# EAGLE board 2x4_v1_CS (EAGLE 5.06)
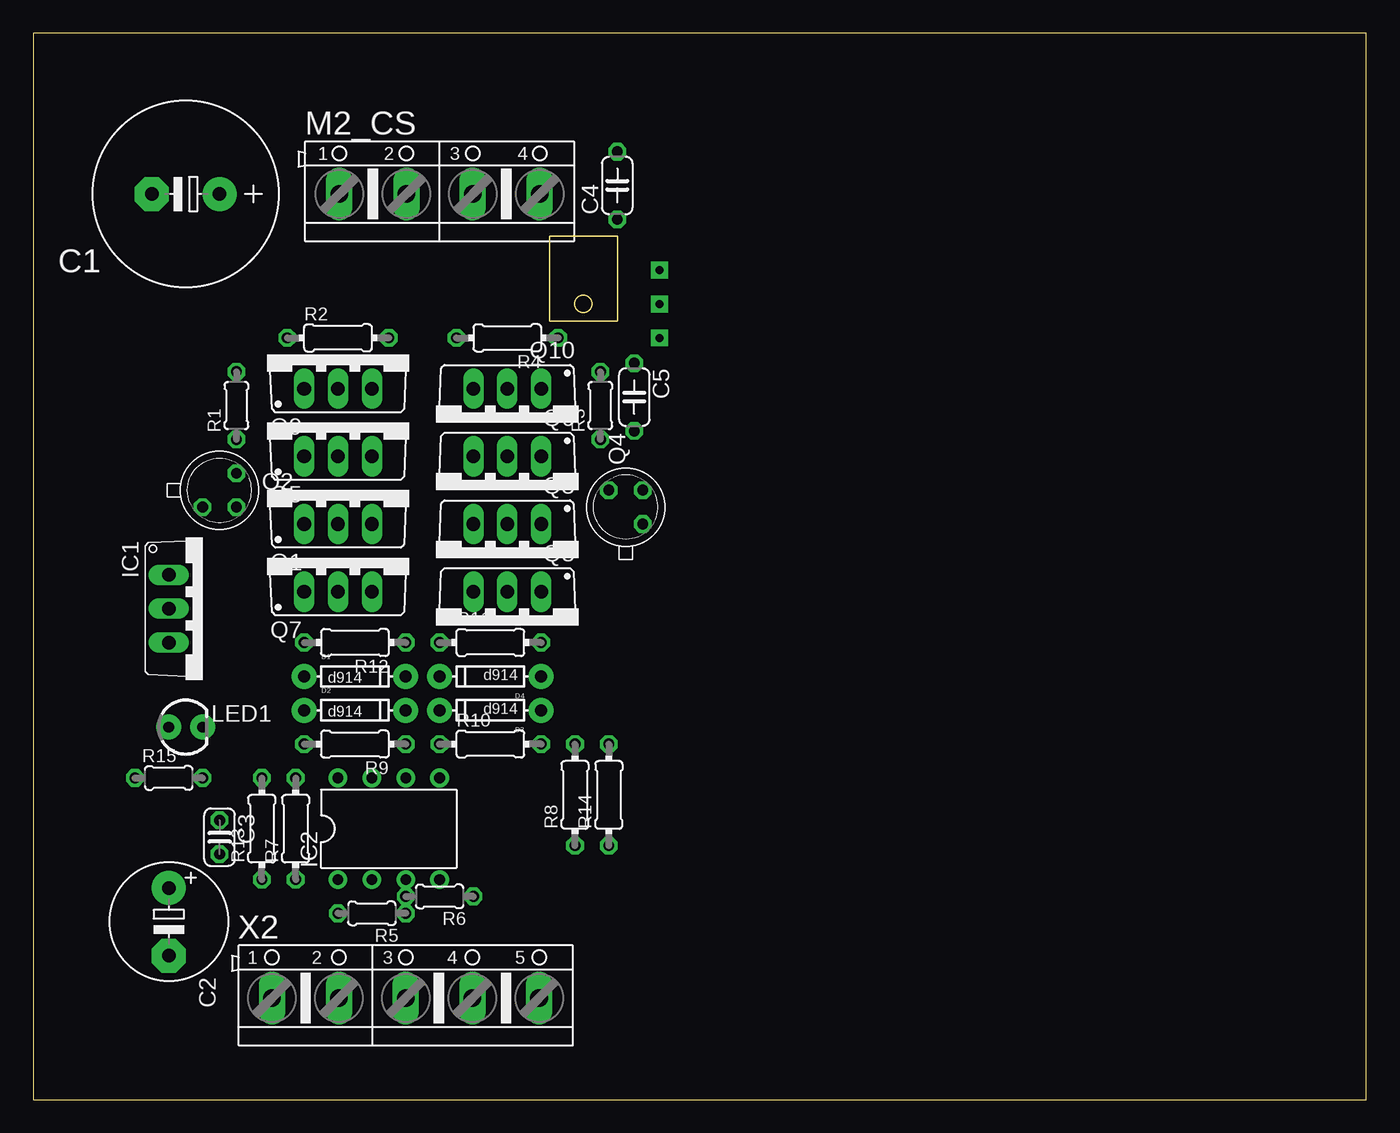
[diagram p0: board, top side]
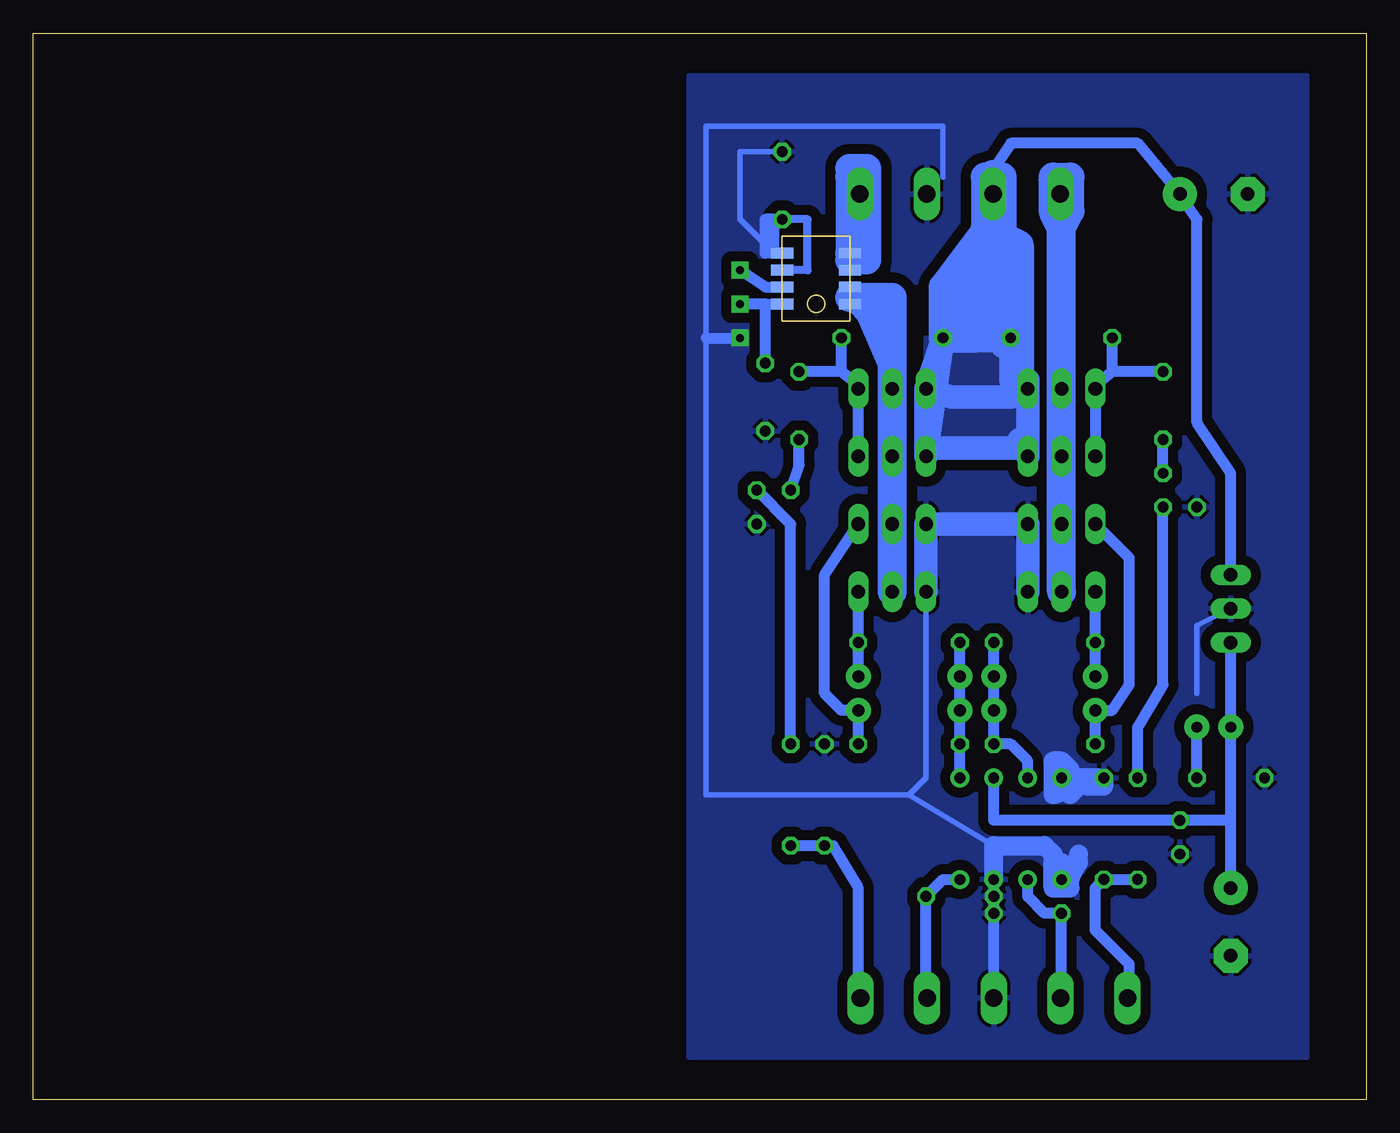
[diagram p1: board, bottom side, seen from below]

Size 100 x 80 mm. Coordinates in mm from the lower left corner, seen from the top.
Outline: 0,0 100,0 100,80 0,80 0,0
Copper layers (1*16): Top 0.035mm / dielectric 1.5mm / Bottom 0.035mm
Design rules "default *": minimum track width 10mil, minimum drill 24mil, track to track 30mil, track to pad 30mil, pad to pad 8mil, via to via 8mil, smd to smd 8mil, copper to edge 40mil, drill to drill 8mil, minimum pad ring 10mil, minimum via ring 8mil, stop-mask expansion 4mil, vias tented up to drill 0mil, thermal gap 10mil

## Footprints (pad centres in the part's own frame; a part is rotated, then mirrored left to right if it is on the bottom)
E5-13 = drill 1.016 pad 2.54 round: + -2.54,0 | drill 1.016 pad 2.54 octagon: - 2.54,0
E5-8,5 = drill 1.016 pad 2.54 round: + -2.54,0 | drill 1.016 pad 2.54 octagon: - 2.54,0
C025-024X044 = drill 0.813 octagon: 1 -1.27,0; 2 1.27,0
C050-024X044 = drill 0.813 octagon: 1 -2.54,0; 2 2.54,0
DIODE-1N4148 = drill 0.9 pad 1.88 round: A -3.81,0; C 3.81,0
TO220V = drill 1.016 long: 1 -2.54,-2.54; 2 0,-2.54; 3 2.54,-2.54
DIL08 = drill 0.8 pad 1.4 round: 1 -3.81,-3.81; 2 -1.27,-3.81; 3 1.27,-3.81; 4 3.81,-3.81; 5 3.81,3.81; 6 1.27,3.81; 7 -1.27,3.81; 8 -3.81,3.81
LED3MM = drill 0.813 pad 1.88 round: A -1.27,0; K 1.27,0
AK500/4 = drill 1.321 long: 1 -7.518,0; 2 -2.489,0; 3 2.489,0; 4 7.518,0
TO220BV = drill 1.016 long: D 0,-2.54; G -2.54,-2.54; S 2.54,-2.54
TO-52 = drill 0.813 octagon: 1 -1.27,-1.27; 2 1.27,-1.27; 3 1.27,1.27
0204/5 = drill 0.813 octagon: 1 -2.54,0; 2 2.54,0
0204/7 = drill 0.813 octagon: 1 -3.81,0; 2 3.81,0
ACS714 = smd 0.813 x 1.676: 1 -1.905,-2.54; 2 -0.635,-2.54; 3 0.635,-2.54; 4 1.905,-2.54; 5 1.905,2.54; 6 0.635,2.54; 7 -0.635,2.54; 8 -1.905,2.54
AK500/5 = drill 1.321 long: 1 -10.033,0; 2 -5.004,0; 3 0,0; 4 5.004,0; 5 10.008,0

## Placement (x,y rotation side)
C1  1000uF  [E5-13]  11.43,67.94 180 top
C2  470uF  [E5-8,5]  10.16,13.34 270 top
C3  1uF  [C025-024X044]  13.97,19.68 270 top
C4  [C050-024X044]  43.81,68.58 90 top
C5  [C050-024X044]  45.09,52.7 270 top
D1  d914  [DIODE-1N4148]  24.13,31.75 0 top
D2  d914  [DIODE-1N4148]  24.13,29.21 0 top
D3  d914  [DIODE-1N4148]  34.29,29.21 180 top
D4  d914  [DIODE-1N4148]  34.29,31.75 180 top
IC1  7812TV  [TO220V]  12.7,36.83 270 top
IC2  IR4427  [DIL08]  26.67,20.32 0 top
LED1  [LED3MM]  11.43,27.94 0 top
M2_CS  [AK500/4]  30.48,67.94 0 top
Q1  [TO220BV]  22.86,45.72 0 top
Q2  2n7000  [TO-52]  13.97,45.72 0 top
Q3  [TO220BV]  35.56,40.64 180 top
Q4  2n7000  [TO-52]  44.45,44.45 90 top
Q5  [TO220BV]  22.86,50.8 0 top
Q6  [TO220BV]  35.56,45.72 180 top
Q7  [TO220BV]  22.86,40.64 0 top
Q8  [TO220BV]  35.56,35.56 180 top
Q9  [TO220BV]  22.86,55.88 0 top
Q10  [TO220BV]  35.56,50.8 180 top
R1  2.2k  [0204/5]  15.24,52.07 90 top
R2  2.2k  [0204/7]  22.86,57.15 0 top
R3  2.2k  [0204/5]  42.55,52.07 90 top
R4  2.2k  [0204/7]  35.56,57.15 180 top
R5  10k  [0204/5]  25.4,13.97 180 top
R6  10k  [0204/5]  30.48,15.24 180 top
R7  10k  [0204/7]  19.68,20.32 90 top
R8  10k  [0204/7]  40.64,22.86 90 top
R9  150  [0204/7]  24.13,26.67 180 top
R10  150  [0204/7]  34.29,26.67 0 top
R11  150  [0204/7]  34.29,34.29 0 top
R12  150  [0204/7]  24.13,34.29 180 top
R13  150  [0204/7]  17.14,20.32 90 top
R14  150  [0204/7]  43.18,22.86 90 top
R15  [0204/5]  10.16,24.13 0 top
U$1  ACS714  [ACS714]  41.27,61.59 90 bottom
X2  [AK500/5]  27.94,7.62 0 top

## Library data of the parts
C1-C5 R5 R6 R8-R12 R14 = rcl
D1-D4 LED1 = SparkFun
IC1 = linear
IC2 = ir
M2_CS X2 = con-ptr500
Q1 Q3 Q5-Q10 = transistor-power
Q2 Q4 = transistor-fet
R1-R4 R7 R13 R15 = resistor
U$1 = A-JD3

## Nets
+5V: C5.1 U$1.8
GND: C1.- C2.- C3.2 C4.2 C5.2 IC1.2 IC2.3 M2_CS.3 Q1.S Q2.1 Q3.S Q4.1 Q7.S Q8.S R5.1 R6.2 R7.2 R8.2 R15.1 U$1.5 X2.3
MOSFET_CS: Q3.D Q6.D Q8.D Q10.D U$1.1 U$1.2
N$1: Q4.2 R14.2
N$2: Q5.G Q9.G R1.2 R2.1
N$3: Q6.G Q10.G R3.2 R4.1
N$5: M2_CS.1 Q1.D Q5.D Q7.D Q9.D
N$6: M2_CS.4 U$1.3 U$1.4
N$7: Q2.3 R1.1
N$9: Q4.3 R3.1
N$10: R7.1 R13.1 X2.1
N$11: R8.1 R14.1 X2.5
N$12: IC2.4 R6.1 X2.4
N$13: IC2.2 R5.2 X2.2
N$14: D2.A Q1.G R9.2
N$15: C4.1 U$1.6
N$16: C2.+ C3.1 IC1.3 IC2.6 LED1.A
N$17: D3.A Q3.G R10.2
N$18: D3.C D4.C IC2.5 R10.1 R11.1
N$19: D1.C D2.C IC2.7 R9.1 R12.1
N$20: D1.A Q7.G R12.2
N$21: D4.A Q8.G R11.2
N$22: LED1.K R15.2
N$24: Q2.2 R13.2
V+: C1.+ IC1.1 M2_CS.2 Q5.S Q6.S Q9.S Q10.S R2.2 R4.2
VOUT: U$1.7

## Tracks (layer width: path | path; a pad name or v marks a point on that pad's centre or on a via)
+5V  (via drill 0.6 pad 1.27)
  Bottom 0.813: 45.09,59.69 U$1.8 | 45.09,59.69 v46.99,59.69 | C5.1 45.09,59.69
GND  (via drill 0.6 pad 1.27)
  Bottom 0.406: 27.94,19.05 34.29,22.86 | 31.75,69.22 31.75,73.03 49.53,73.03 49.53,57.15 49.53,22.86 34.29,22.86 | 12.7,30.48 12.7,35.56 IC1.2 | Q8.S 33.02,24.13 34.29,22.86 | 44.45,63.5 46.99,66.04 46.99,71.12 C4.2
  Bottom 0.813: IC2.3 R5.1 X2.3 | 49.53,57.15 v46.99,57.15 | U$1.5 44.45,63.5 | 44.45,63.5 45.09,63.5 45.09,66.04 44.45,66.04 44.45,63.5
  Bottom 1.422: 23.5,25.4 22.86,25.4 22.23,24.77 22.23,24.13 R7.2 19.68,23.5 20.95,23.5 | 23.5,25.4 22.23,22.86 21.59,23.5 23.5,22.86 23.5,25.4 | 21.59,18.41 21.59,17.78 22.23,16.51 22.23,15.88 23.5,15.88 | 23.5,15.88 23.5,17.78 22.86,17.78 22.86,17.14 | 23.5,15.88 23.5,18.41 24.13,19.05 27.94,19.05 IC2.3
  Bottom 1.778: Q7.S Q1.S Q3.S Q8.S
  pour Bottom: 4.45,76.83 50.8,76.83 50.8,3.17 4.45,3.17
MOSFET_CS  (2 unrouted)
  Bottom 0.254: Q6.D 36.07,48.26
  Bottom 1.778: Q8.D Q3.D | 35.56,57.78 36.96,60.2
  Bottom 2.184: Q8.D Q6.D Q10.D 35.56,55.24 | 35.56,57.15 35.56,57.78 35.56,60.2 36.96,60.2 38.23,60.2 | 35.56,55.24 35.56,57.15 | 38.23,60.2 38.73,60.2 | 35.56,57.15 38.23,60.2 | 35.56,55.24 37.47,59.69
N$1
  Bottom 0.813: R14.2 43.18,43.18 Q4.2
N$2
  Bottom 0.254: Q9.G 20.07,53.59 20.32,53.59
  Bottom 0.813: R1.2 19.05,54.61 | 19.05,54.61 R2.1 | 19.05,54.61 20.32,53.59 Q9.G Q5.G
N$3
  Bottom 0.254: Q10.G 38.35,53.59 38.1,53.59
  Bottom 0.813: Q6.G Q10.G 38.1,53.59 39.37,54.61 | 39.37,54.61 R4.1 | 39.37,54.61 R3.2
N$4
  Bottom 2.184: 27.94,69.22 27.94,67.94 | 27.94,69.22 28.57,69.22 28.57,65.41 | 27.94,69.22 27.3,69.22 27.3,65.41
N$5
  Bottom 0.254: M2_CS.1 22.86,69.85 23.5,69.22
  Bottom 1.778: Q7.D Q1.D Q5.D Q9.D 22.86,65.41
  Bottom 2.184: Q7.D 22.86,65.41 | 22.86,65.41 23.5,69.22 | 23.5,69.22 22.23,69.22 22.23,66.67 22.86,65.41 | 22.86,65.41 23.5,66.67 23.5,69.22 | 23.5,69.22 M2_CS.1
N$6  (1 unrouted)
  Bottom 0.254: M2_CS.4 38.35,69.6 37.47,69.6
  Bottom 1.778: 38.1,62.99 38.1,69.22 | 37.47,62.99 37.47,69.22
  Bottom 2.184: 38.73,62.99 38.1,62.99 37.47,62.99 37.47,69.6 37.47,69.85 38.73,69.85 38.1,69.22 38.73,69.22 U$1.4
N$7
  Bottom 0.813: Q2.3 R1.1
N$8  (via drill 0.6 pad 1.27)
  Bottom 0.813: 44.45,60.96 45.09,60.96 v46.99,62.23
N$9
  Bottom 0.813: Q4.3 42.55,47.62 R3.1
N$10
  Bottom 0.254: 17.78,7.62 X2.1
  Bottom 0.813: R13.1 R7.1 20.32,15.88 20.32,12.7 17.78,10.16 17.78,7.62 17.78,6.35
N$11
  Bottom 0.254: X2.5 38.1,7.62
  Bottom 0.813: 38.1,6.35 38.1,7.62 38.1,15.88 40.01,19.05 R8.1 R14.1
N$12
  Bottom 0.254: X2.4 33.02,7.62
  Bottom 0.813: IC2.4 31.75,16.51 R6.1 33.02,7.62 33.02,6.35
N$13
  Bottom 0.254: 22.86,7.62 X2.2
  Bottom 0.813: IC2.2 25.4,15.24 24.13,13.97 R5.2 22.86,7.62 22.86,6.35
N$14
  Bottom 0.813: Q1.G 17.78,40.64 17.78,31.11 19.05,29.21 D2.A R9.2
N$15
  Bottom 0.61: U$1.6 41.91,62.23 41.91,66.04 C4.1
N$16
  Bottom 0.813: IC2.6 27.94,20.95 C3.1 10.16,20.95 | C2.+ 10.16,20.95 | 10.16,20.95 LED1.A IC1.3
N$17
  Bottom 0.813: Q3.G 40.64,39.37 40.64,30.48 39.37,29.21 D3.A R10.2
N$18
  Bottom 0.813: IC2.5 R10.1 D3.C D4.C R11.1
N$19
  Bottom 0.813: IC2.7 25.4,25.4 26.67,26.67 R9.1 D2.C D1.C R12.1
N$20
  Bottom 0.813: Q7.G R12.2 D1.A
N$21
  Bottom 0.813: Q8.G R11.2 D4.A
N$22
  Bottom 0.813: R15.2 LED1.K
N$24
  Bottom 0.813: R13.2 17.14,27.94 15.24,31.11 Q2.2
V+
  Bottom 0.254: 27.94,69.85 M2_CS.2
  Bottom 0.406: Q6.S Q5.S | R2.2 26.04,57.78 | 27.94,58.42 31.75,57.78 R4.2
  Bottom 0.813: IC1.1 10.16,46.99 12.7,50.8 12.7,66.04 C1.+ 17.14,71.75 26.67,71.75 27.94,69.85 27.94,69.22
  Bottom 1.778: R4.2 Q6.S 33.02,48.9 | R2.2 27.3,56.52 | R2.2 26.67,53.98 Q9.S | Q9.S 25.4,48.9 | Q5.S 25.4,48.9 | 27.94,62.23 R2.2 | Q10.S 33.02,48.9 | Q10.S 31.11,52.7 26.67,52.7 26.04,53.34 Q9.S | R4.2 Q10.S | 27.94,62.23 26.04,57.78 27.94,58.42 27.94,62.23 | R4.2 27.94,62.23 | R4.2 30.48,57.15 | Q9.S 25.4,53.98 26.04,54.61 26.04,57.15 R2.2 | 33.02,48.9 25.4,48.9 | 25.4,48.9 26.04,49.53
  Bottom 2.184: 29.21,57.15 R2.2 26.67,64.14 | 27.3,64.77 27.94,65.41 31.75,60.96 | 27.3,64.77 26.67,64.14 | R4.2 29.21,57.15 | 29.21,57.15 29.21,61.59 R4.2 | 26.67,64.14 26.04,64.14 | 26.04,64.14 26.04,57.78 | 26.04,57.78 26.04,57.15 | 26.04,57.78 26.04,53.34 | 27.3,64.77 26.04,64.14 | 27.94,66.04 31.75,60.96 | 31.75,60.96 R4.2
  Bottom 2.54: 27.94,69.22 27.94,66.04 27.94,65.41 27.94,62.23
  pour Bottom: 25.4,57.78 25.4,48.26 33.02,48.26 33.02,57.15 29.84,57.78